# EAGLE board famicom_adapter (EAGLE 7.6.0)
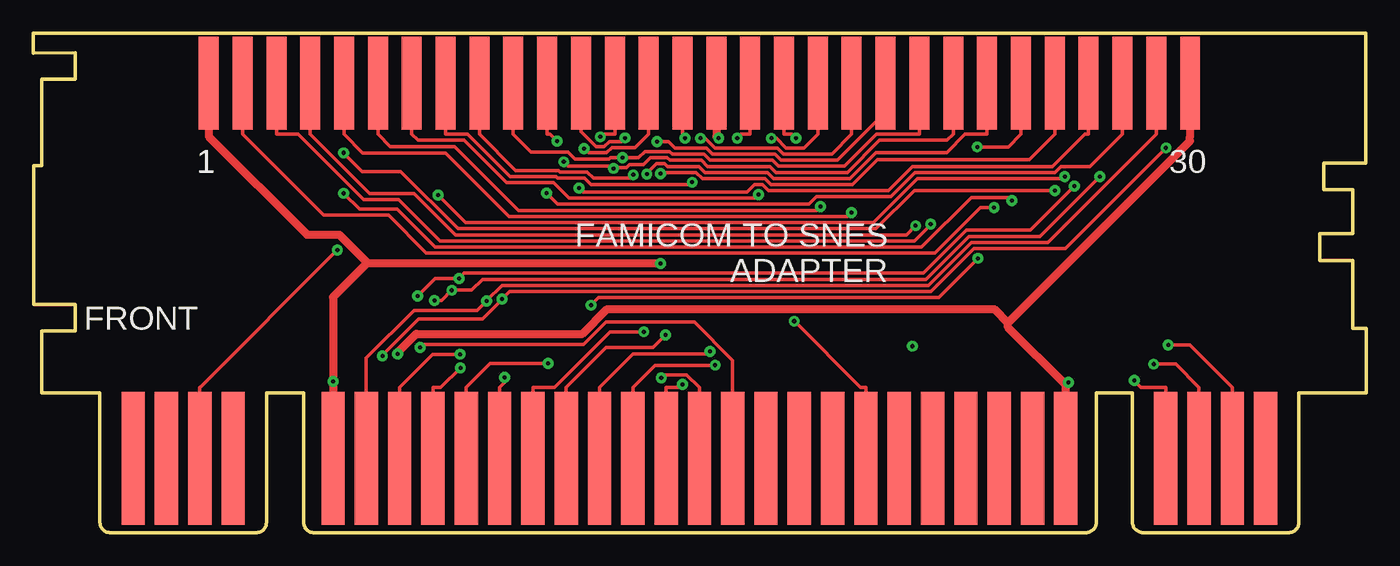
[diagram p0: board, top side]
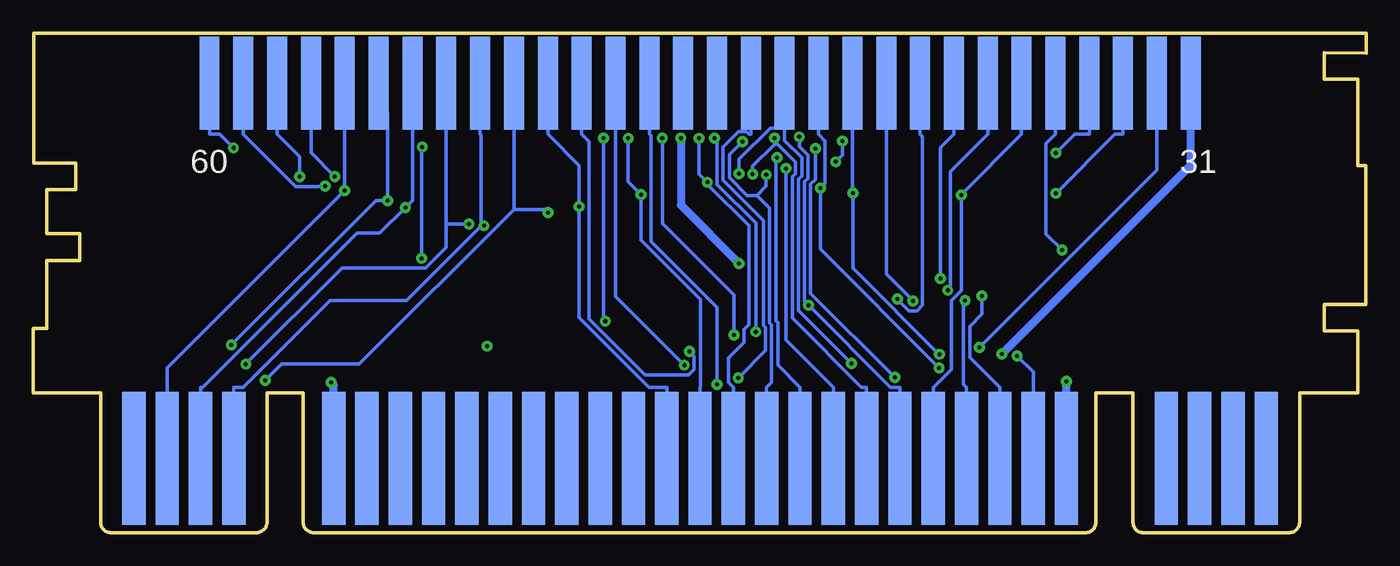
[diagram p1: board, bottom side, seen from below]

Size 100.05 x 37.5 mm. Coordinates in mm from the lower left corner, seen from the top.
Outline: 5,0.75 arc90 5.8,0 16.8,0 arc90 17.5,0.8 17.5,10.5 20.3,10.5 20.3,0.8 arc90 21,0 79,0 arc90 79.8,0.8 79.8,10.5 82.5,10.5 82.5,0.8 arc90 83.3,0 94.2,0 arc90 95,0.75 95,10.5 100.05,10.5 100.05,15.35 99.05,15.35 99.05,20.45 96.55,20.45 96.55,22.45 99.05,22.45 99.05,25.75 96.85,25.75 96.85,27.75 100,27.75 100,37.5 0,37.5 0,36 3.15,36.05 3.15,34.05 0.65,34.05 0.65,27.55 0.05,27.55 0.05,17.15 3.15,17.15 3.15,15.15 0.65,15.15 0.65,10.5 5,10.5 5,0.75
Copper layers (1*16): Top 0.035mm / dielectric 1.5mm / Bottom 0.035mm
Design rules "SparkFun_small": minimum track width 8mil, minimum drill 12mil, track to track 8mil, track to pad 8mil, pad to pad 8mil, via to via 8mil, smd to smd 8mil, copper to edge 20mil, drill to drill 12mil, minimum pad ring 12mil, minimum via ring 10mil, stop-mask expansion 4mil, vias tented up to drill 25mil, thermal gap 10mil
Net classes: 0 default: width 0.254 mm, drill 0.305 mm, clearance 0.203 mm; 1 power: width 0.61 mm, drill 0.406 mm, clearance 0.203 mm; 2 gnd: width 0.61 mm, drill 0.406 mm, clearance 0.203 mm; 3 power usb: width 0.61 mm, drill 0.406 mm, clearance 0.203 mm

## Footprints (pad centres in the part's own frame; a part is rotated, then mirrored left to right if it is on the bottom)
CART-EXP-PINS-LONG = smd 1.75 x 10 bottom: 1 42.5,-1.42; 2 40,-1.42; 3 37.5,-1.42; 4 35,-1.42; 5 27.5,-1.42; 6 25,-1.42; 7 22.5,-1.42; 8 20,-1.42; 9 17.5,-1.42; 10 15,-1.42; 11 12.5,-1.42; 12 10,-1.42; 13 7.5,-1.42; 14 5,-1.42; 15 2.5,-1.42; 16 0,-1.42; 17 -2.5,-1.42; 18 -5,-1.42; 19 -7.5,-1.42; 20 -10,-1.42; 21 -12.5,-1.42; 22 -15,-1.42; 23 -17.5,-1.42; 24 -20,-1.42; 25 -22.5,-1.42; 26 -25,-1.42; 27 -27.5,-1.42; 28 -35,-1.42; 29 -37.5,-1.42; 30 -40,-1.42; 31 -42.5,-1.42 | smd 1.75 x 10: 32 42.5,-1.42; 33 40,-1.42; 34 37.5,-1.42; 35 35,-1.42; 36 27.5,-1.42; 37 25,-1.42; 38 22.5,-1.42; 39 20,-1.42; 40 17.5,-1.42; 41 15,-1.42; 42 12.5,-1.42; 43 10,-1.42; 44 7.5,-1.42; 45 5,-1.42; 46 2.5,-1.42; 47 0,-1.42; 48 -2.5,-1.42; 49 -5,-1.42; 50 -7.5,-1.42; 51 -10,-1.42; 52 -12.5,-1.42; 53 -15,-1.42; 54 -17.5,-1.42; 55 -20,-1.42; 56 -22.5,-1.42; 57 -25,-1.42; 58 -27.5,-1.42; 59 -35,-1.42; 60 -37.5,-1.42; 61 -40,-1.42; 62 -42.5,-1.42
FAMICOM_PINS = smd 1.5 x 7: 1 -36.83,-0.5; 2 -34.29,-0.5; 3 -31.75,-0.5; 4 -29.21,-0.5; 5 -26.67,-0.5; 6 -24.13,-0.5; 7 -21.59,-0.5; 8 -19.05,-0.5; 9 -16.51,-0.5; 10 -13.97,-0.5; 11 -11.43,-0.5; 12 -8.89,-0.5; 13 -6.35,-0.5; 14 -3.81,-0.5; 15 -1.27,-0.5; 16 1.27,-0.5; 17 3.81,-0.5; 18 6.35,-0.5; 19 8.89,-0.5; 20 11.43,-0.5; 21 13.97,-0.5; 22 16.51,-0.5; 23 19.05,-0.5; 24 21.59,-0.5; 25 24.13,-0.5; 26 26.67,-0.5; 27 29.21,-0.5; 28 31.75,-0.5; 29 34.29,-0.5; 30 36.83,-0.5 | smd 1.5 x 7 bottom: 31 -36.83,-0.5; 32 -34.29,-0.5; 33 -31.75,-0.5; 34 -29.21,-0.5; 35 -26.67,-0.5; 36 -24.13,-0.5; 37 -21.59,-0.5; 38 -19.05,-0.5; 39 -16.51,-0.5; 40 -13.97,-0.5; 41 -11.43,-0.5; 42 -8.89,-0.5; 43 -6.35,-0.5; 44 -3.81,-0.5; 45 -1.27,-0.5; 46 1.27,-0.5; 47 3.81,-0.5; 48 6.35,-0.5; 49 8.89,-0.5; 50 11.43,-0.5; 51 13.97,-0.5; 52 16.51,-0.5; 53 19.05,-0.5; 54 21.59,-0.5; 55 24.13,-0.5; 56 26.67,-0.5; 57 29.21,-0.5; 58 31.75,-0.5; 59 34.29,-0.5; 60 36.83,-0.5

## Placement (x,y rotation side)
U$1  CART-EXP-EDGE  [CART-EXP-PINS-LONG]  50,7 0 bottom
U$2  FAMICOM-CART_PINS  [FAMICOM_PINS]  50,34.25 0 top

## Library data of the parts
U$1 = snes_cart_mod4
U$2 = !sanni_mod3

## Nets
!PPU_A13: U$1.13 U$2.49
A0: U$1.41 U$2.13 U$2.25
A1: U$1.42 U$2.12 U$2.24
A2: U$1.43 U$2.11 U$2.23
A3: U$1.44 U$2.10 U$2.22
A4: U$1.45 U$2.9 U$2.21
A5: U$1.46 U$2.8 U$2.20
A6: U$1.47 U$2.7 U$2.19
A7: U$1.48 U$2.6 U$2.50
A8: U$1.28 U$2.5 U$2.51
A9: U$1.59 U$2.4 U$2.52
A10: U$1.29 U$2.3 U$2.53
A11: U$1.60 U$2.2 U$2.54
A12: U$1.30 U$2.33 U$2.55
A13: U$1.61 U$2.34 U$2.56
A14: U$1.3 U$2.35
CIRAM_A10: U$1.21 U$2.18
CIRAM_CE: U$1.14 U$2.48
CPU_RW: U$1.10 U$2.14
D0: U$1.9 U$2.26 U$2.43
D1: U$1.8 U$2.27 U$2.42
D2: U$1.7 U$2.28 U$2.41
D3: U$1.6 U$2.29 U$2.40
D4: U$1.37 U$2.39 U$2.60
D5: U$1.38 U$2.38 U$2.59
D6: U$1.39 U$2.37 U$2.58
D7: U$1.40 U$2.36 U$2.57
GND [gnd]: U$1.5 U$1.36 U$2.1 U$2.16
IRQ: U$1.11 U$2.15
M2: U$1.17 U$2.32
PPU_RD: U$1.12 U$2.17
PPU_WR: U$1.15 U$2.47
ROMSEL: U$1.16 U$2.44
VCC [power]: U$1.27 U$1.58 U$2.30 U$2.31

## Tracks (layer width: path | path; a pad name or v marks a point on that pad's centre or on a via)
!PPU_A13  (via drill 0.3 pad 0.81)
  Top 0.254: v50.8,13.6 50.64,13.44 45.02,13.44 42.5,10.91 U$1.13
  Bottom 0.254: U$2.49 58.89,29.92 58.34,29.37 58.34,16.05 54.12,11.84 50.88,11.84 50.44,12.27 50.44,13.24 v50.8,13.6
A0  (via drill 0.3 pad 0.81)
  Top 0.254: U$2.25 74.13,29.92 73.18,28.97 v70.85,28.97 | v70.91,20.6 67.96,17.66 42.45,17.66 v41.87,17.08 | v42.56,29.72 42.75,29.92 43.65,29.92 U$2.13
  Bottom 0.254: v42.56,29.72 42.56,29 41.91,28.35 41.91,26.6 42.16,26.36 42.16,17.37 v41.87,17.08 35.7,10.91 35,10.91 U$1.41 | v70.91,20.6 70.91,28.91 v70.85,28.97
A1  (via drill 0.3 pad 0.81)
  Top 0.254: v46.05,26.91 46.05,27 46.76,27.71 47.39,27.71 47.59,27.5 49.95,27.5 50.41,27.05 55.11,27.05 55.56,26.6 61.3,26.6 63.26,28.55 68.56,28.55 69.94,29.92 71.59,29.92 U$2.24 | v44.43,29.64 44.15,29.36 43.23,29.36 42.86,28.98 42.25,28.98 41.11,30.12 U$2.12
  Bottom 0.254: 44.4,29.18 46.05,27.52 v46.05,26.91 | 44.4,29.18 44.19,29.18 42.83,27.81 42.83,26.98 43.08,26.73 43.08,16.11 37.88,10.91 37.5,10.91 U$1.42 | 44.4,29.18 44.4,29.61 v44.43,29.64
A2  (via drill 0.3 pad 0.81)
  Top 0.254: v39.31,29.39 38.78,29.92 38.57,29.92 U$2.11 | 43.56,27.42 43.45,27.54 40.13,27.54 v39.82,27.85 | v43.56,27.35 43.56,27.42 | 43.56,27.42 44.52,27.42 44.75,27.65 45.8,27.65 46.32,28.16 47.58,28.16 47.78,27.96 50.14,27.96 50.6,27.5 55.3,27.5 55.75,27.05 61.11,27.05 63.52,29.46 68.59,29.46 69.05,29.92 U$2.23
  Bottom 0.254: v39.82,27.85 39.31,28.36 v39.31,29.39 | v43.56,27.35 43.56,14.47 40,10.91 U$1.43
A3  (via drill 0.3 pad 0.81)
  Top 0.254: U$2.22 66.51,29.92 63.28,29.92 60.88,27.51 55.94,27.51 55.49,27.96 50.79,27.96 50.33,28.42 47.97,28.42 47.77,28.62 45.9,28.62 45.45,28.17 v44.22,28.17 43.34,28.17 43.23,28.06 40.65,28.06 40.13,28.59 37.37,28.59 36.03,29.92 U$2.10
  Bottom 0.254: v44.22,28.17 44.3,28.09 44.3,15.9 44.17,15.77 44.17,12.58 42.5,10.91 U$1.44
A4  (via drill 0.3 pad 0.81)
  Top 0.254: v45.04,26.87 44.78,26.62 42.03,26.62 41.57,27.08 39.54,27.08 39.43,27.19 36.22,27.19 33.49,29.92 U$2.9 | U$2.21 63.97,31.57 60.37,27.97 56.13,27.97 55.68,28.42 50.98,28.42 50.52,28.88 48.16,28.88 47.68,29.36 v46.82,29.36
  Bottom 0.254: 45.74,25.33 44.78,24.36 44.78,15.73 44.63,15.58 44.63,11.28 45,10.91 U$1.45 | 45.74,25.33 45.04,26.04 v45.04,26.87 | v46.82,29.36 47.8,28.37 47.8,26.66 46.47,25.33 45.74,25.33
A5  (via drill 0.3 pad 0.81)
  Top 0.254: v49.46,26.31 49.28,26.14 41.87,26.14 41.39,26.62 39.37,26.62 39.24,26.74 35.79,26.74 32.6,29.92 30.95,29.92 U$2.8 | v50.08,29.61 50.43,29.61 51.16,28.88 55.87,28.88 56.32,28.43 59.94,28.43 61.43,29.92 U$2.20
  Bottom 0.254: v50.08,29.61 50.08,26.94 v49.46,26.31 49.46,26.15 46.35,23.04 46.35,15.62 46.72,15.24 46.72,14.27 47.87,13.12 47.87,11.28 47.5,10.91 U$1.46
A6  (via drill 0.3 pad 0.81)
  Top 0.254: v54.43,25.4 54.15,25.12 40.22,25.12 39.06,26.28 35.52,26.28 32.34,29.46 28.87,29.46 28.41,29.92 U$2.7 | v55.39,29.61 55.78,29.61 56.51,28.88 57.85,28.88 58.89,29.92 U$2.19
  Bottom 0.254: v55.39,29.61 55.39,26.36 v54.43,25.4 54.43,21.96 49.98,17.51 49.98,10.93 50,10.91 U$1.47
A7  (via drill 0.3 pad 0.81)
  Top 0.254: v59.08,24.48 58.79,24.2 36.43,24.2 31.63,29 26.78,29 25.87,29.92 U$2.6
  Bottom 0.254: U$1.48 52.5,10.91 53.85,10.91 59.08,16.14 v59.08,24.48 59.08,27.56 61.43,29.92 U$2.50
A8  (via drill 0.3 pad 0.81)
  Top 0.254: v61.42,24.03 61.13,23.74 35.72,23.74 30.94,28.52 24.73,28.52 23.33,29.92 U$2.5 | v82.64,11.43 83.15,10.91 85,10.91 U$1.28
  Bottom 0.254: 63.97,24.27 75.59,12.65 81.41,12.65 v82.64,11.43 | 63.97,24.27 63.97,29.92 U$2.51 | 63.97,24.27 61.65,24.27 v61.42,24.03
A9  (via drill 0.3 pad 0.81)
  Top 0.254: U$2.4 20.79,29.92 25.23,25.48 28.57,25.48 31.68,22.36 65.54,22.36 v66.23,23.05
  Bottom 0.254: 66.44,23.05 66.44,23.04 72.04,17.44 77.75,17.44 84.28,10.91 85,10.91 U$1.59 | 66.44,23.05 66.44,29.85 66.51,29.92 U$2.52 | 66.44,23.05 v66.23,23.05
A10  (via drill 0.3 pad 0.81)
  Top 0.254: v67.36,23.16 67.36,23.14 66.12,21.9 30.53,21.9 27.41,25.02 24.8,25.02 19.89,29.92 18.25,29.92 U$2.3 | v84.1,12.65 85.76,12.65 87.5,10.91 U$1.29
  Bottom 0.254: 69.05,23.16 69.05,21.41 70.6,19.86 76.89,19.86 v84.1,12.65 | 69.05,23.16 U$2.53 | 69.05,23.16 v67.36,23.16
A11  (via drill 0.3 pad 0.81)
  Top 0.254: v72.12,24.42 71.1,24.42 67.66,20.98 29.5,20.98 26.65,23.84 21.8,23.84 15.71,29.92 U$2.2
  Bottom 0.254: U$1.60 87.5,10.91 87.32,10.91 75.74,22.49 74.05,22.49 v72.12,24.42 71.59,24.95 71.59,29.92 U$2.54
A12  (via drill 0.3 pad 0.81)
  Top 0.254: v23.29,25.48 24.48,24.29 27.32,24.29 30.17,21.44 66.68,21.44 70.4,25.16 73.23,25.16 v73.45,24.94 | v85.18,14.09 86.82,14.09 90,10.91 U$1.30
  Bottom 0.254: v85.18,14.09 74.33,24.94 v73.45,24.94 73.45,31.54 74.13,32.22 U$2.55 | v23.29,25.48 18.85,29.92 18.25,29.92 U$2.33
A13  (via drill 0.3 pad 0.81)
  Top 0.254: v76.67,25.68 66.12,25.68 63.26,22.82 31.87,22.82 27.56,27.13 24.67,27.13 v23.28,28.52
  Bottom 0.254: v23.28,28.52 21.88,29.92 20.79,29.92 U$2.34 | U$2.56 76.67,29.92 v76.67,25.68 90,12.35 90,10.91 U$1.61
A14  (via drill 0.3 pad 0.81)
  Top 0.254: U$1.3 12.5,10.91 12.51,10.91 v22.82,21.22
  Bottom 0.254: U$2.35 23.33,29.92 24.03,29.22 24.03,22.43 v22.82,21.22
CIRAM_A10  (via drill 0.3 pad 0.81)
  Top 0.254: v57.12,15.88 62.09,10.91 62.5,10.91 U$1.21 | U$2.18 56.35,29.92 56.95,29.92 v57.25,29.62
  Bottom 0.254: v57.25,29.62 57.25,16.01 v57.12,15.88
CIRAM_CE  (via drill 0.3 pad 0.81)
  Top 0.254: v51.18,12.57 46.66,12.57 45,10.91 U$1.14
  Bottom 0.254: v51.18,12.57 56.35,17.74 56.35,29.92 U$2.48
CPU_RW  (via drill 0.3 pad 0.81)
  Top 0.254: v41.35,28.84 41.67,28.52 43.04,28.52 43.42,28.9 45.17,28.9 46.19,29.92 U$2.14 | v35.38,11.65 35.38,11.29 35,10.91 U$1.10
  Bottom 0.254: v35.38,11.65 41.7,17.98 41.7,26.17 41.35,26.52 v41.35,28.84
D0  (via drill 0.3 pad 0.81)
  Top 0.254: v47.07,26.97 47.15,27.05 49.76,27.05 50.22,26.59 54.92,26.59 55.37,26.14 61.49,26.14 63.37,28.01 74.76,28.01 76.67,29.92 U$2.26 | v38.63,12.7 34.29,12.7 32.5,10.91 U$1.9
  Bottom 0.254: 43.65,30.38 44.73,30.38 47.07,28.04 v47.07,26.97 | 43.65,30.38 43.65,29.44 42.37,28.16 42.37,26.79 42.62,26.54 42.62,16.7 v38.63,12.7 | U$2.43 43.65,30.38
D1  (via drill 0.3 pad 0.81)
  Top 0.254: v40.96,25.86 41.25,25.57 53.56,25.57 54.12,26.13 54.73,26.13 55.18,25.68 64.18,25.68 66,27.5 76.49,27.5 78.91,29.92 79.21,29.92 U$2.27 | v32.06,12.38 30.59,10.91 30,10.91 U$1.8
  Bottom 0.254: v32.06,12.38 40.96,21.29 v40.96,25.86 40.61,26.22 40.61,29.42 41.11,29.92 U$2.42
D2  (via drill 0.3 pad 0.81)
  Top 0.254: v38.54,25.49 39.37,24.66 58.21,24.66 58.77,25.22 64.37,25.22 66.18,27.04 76.68,27.04 77.12,27.48 79.31,27.48 81.75,29.92 U$2.28 | v32.03,13.4 29.99,13.4 27.5,10.91 U$1.7
  Bottom 0.254: v32.03,13.4 32.08,13.4 38.54,19.85 v38.54,25.49 38.57,25.52 38.57,29.92 U$2.41 | v32.03,13.4
D3  (via drill 0.3 pad 0.81)
  Top 0.254: U$2.29 84.29,29.92 76.16,21.79 70.41,21.79 67.19,18.57 35.17,18.57 34.03,17.43 v34.03,17.41 33.31,16.69 28.57,16.69 25,13.12 25,10.91 U$1.6
  Bottom 0.254: U$2.40 36.03,19.43 34.03,17.43 v34.03,17.41
D4  (via drill 0.3 pad 0.81)
  Top 0.254: v26.2,13.28 26.2,13.33 28.94,16.06 33.74,16.06 35.18,17.5 v35.18,17.54 35.75,18.11 67.38,18.11 70.6,21.34 77.47,21.34 v85.02,28.89
  Bottom 0.254: v26.2,13.28 25,12.07 U$1.37 | v35.18,17.54 35.18,17.51 34.33,16.66 33.73,16.66 33.3,17.09 33.3,29.73 33.49,29.92 U$2.39 | U$2.60 86.83,29.92 86.05,29.92 v85.02,28.89
D5  (via drill 0.3 pad 0.81)
  Top 0.254: v28.86,17.78 30.16,19.09 v31.96,19.09 32.35,19.48 66.81,19.48 70.03,22.71 74.84,22.71 v78.15,26.02
  Bottom 0.254: U$1.38 27.5,10.91 29.76,13.17 29.76,15.5 28.86,16.4 v28.86,17.78 | U$2.59 84.29,29.92 80.38,26 78.17,26 v78.15,26.02 | v31.96,19.09 31.96,28.91 30.95,29.92 U$2.38 | v31.96,19.09
D6  (via drill 0.3 pad 0.81)
  Top 0.254: v80.06,26.74 75.56,22.25 70.22,22.25 67,19.03 33.71,19.03 32.89,18.2 v31.41,18.2 30.64,17.43 v30.11,17.43
  Bottom 0.254: v30.11,17.43 30.22,17.31 30.22,11.13 30,10.91 U$1.39 | v31.41,18.2 31.22,18.4 31.22,27.11 28.41,29.92 U$2.37 | v80.06,26.74 80.06,28.23 81.75,29.92 U$2.58
D7  (via drill 0.3 pad 0.81)
  Top 0.254: v77.41,26.73 77.25,26.57 66.36,26.57 63.07,23.28 32.47,23.28 v30.4,25.35
  Bottom 0.254: U$1.40 32.5,10.91 32.48,10.91 31.13,12.26 31.13,17.44 30.4,18.18 v30.4,25.35 30.4,25.39 25.87,29.92 U$2.36 | U$2.57 79.21,28.53 v77.41,26.73
GND  (via drill 0.3 pad 0.81)
  Top 0.61: 25.04,20.22 22.5,17.68 v22.5,11.37 U$1.5 | 25.04,20.22 25.04,20.31 22.97,22.38 20.54,22.38 13.17,29.74 U$2.1 | v47.08,20.22 25.04,20.22 | v51.45,29.64 51.38,29.64 51.27,29.74 U$2.16
  Bottom 0.61: v51.45,29.64 51.45,24.58 v47.08,20.22 | v22.5,11.37 22.5,11.09 U$1.5
IRQ  (via drill 0.3 pad 0.81)
  Top 0.254: v45.82,15.09 43.31,15.09 39.13,10.91 37.5,10.91 U$1.11 | v48.93,29.62 48.93,29.72 48.73,29.92 U$2.15
  Bottom 0.254: v48.93,29.62 48.72,29.41 48.72,26.13 45.82,23.23 v45.82,15.09 | v45.82,15.09
M2  (via drill 0.3 pad 0.81)
  Top 0.254: v29.02,13.9 29.25,14.14 41.32,14.14 43.01,15.82 49.62,15.82 52.5,12.94 52.5,10.91 U$1.17
  Bottom 0.254: U$2.32 15.71,27.22 v29.02,13.9
N$28  (via drill 0.3 pad 0.81)
  other vias: 66,14
PPU_RD  (via drill 0.3 pad 0.81)
  Top 0.254: v47.46,14.85 46.51,13.89 42.98,13.89 40,10.91 U$1.12 | v52.84,29.63 53.12,29.92 53.81,29.92 U$2.17
  Bottom 0.254: v52.84,29.63 52.84,23.21 47.46,17.83 v47.46,14.85
PPU_WR  (via drill 0.3 pad 0.81)
  Top 0.254: v48.72,11.12 48.51,10.91 47.5,10.91 U$1.15
  Bottom 0.254: v48.72,11.12 48.72,16.9 53.69,21.87 53.69,29.8 53.81,29.92 U$2.47
ROMSEL  (via drill 0.3 pad 0.81)
  Top 0.254: v47.13,11.63 47.37,11.86 49.05,11.86 50,10.91 U$1.16
  Bottom 0.254: v47.13,11.63 45.09,13.68 45.09,15.39 45.23,15.54 45.23,23.43 48.26,26.46 48.26,28.96 47.12,30.1 46.51,30.1 46.34,29.92 46.19,29.92 U$2.44
VCC  (via drill 0.3 pad 0.81)
  Top 0.61: v27.34,13.42 | v27.34,13.42 27.34,13.53 28.75,14.94 41.22,14.94 43.08,16.79 72.13,16.79 73.17,15.75 | 73.17,15.75 86.83,29.41 86.83,29.74 U$2.30 | 77.5,11.09 73.17,15.41 73.17,15.75 | 77.5,11.09 v77.7,11.29 | U$1.58 77.5,11.09
  Bottom 0.61: v27.34,13.42 27.34,13.43 13.17,27.6 U$2.31 | v77.7,11.29 77.5,11.09 U$1.58

## Text on the board
tNames: 1 | 30 | FAMICOM TO SNES / ADAPTER | FRONT
bNames: 31 | 60